# Altium PCB rev.2_2020-05-04_22-29-06.pcbdoc
Units mil, origin at the board's own origin, x right, y up, seen from the top; angles counter-clockwise.
Board outline 1820 x 1875 mil, 2 copper layers (Top Layer, Bottom Layer); 13 components, 21 nets, 74 pads, 46 vias.
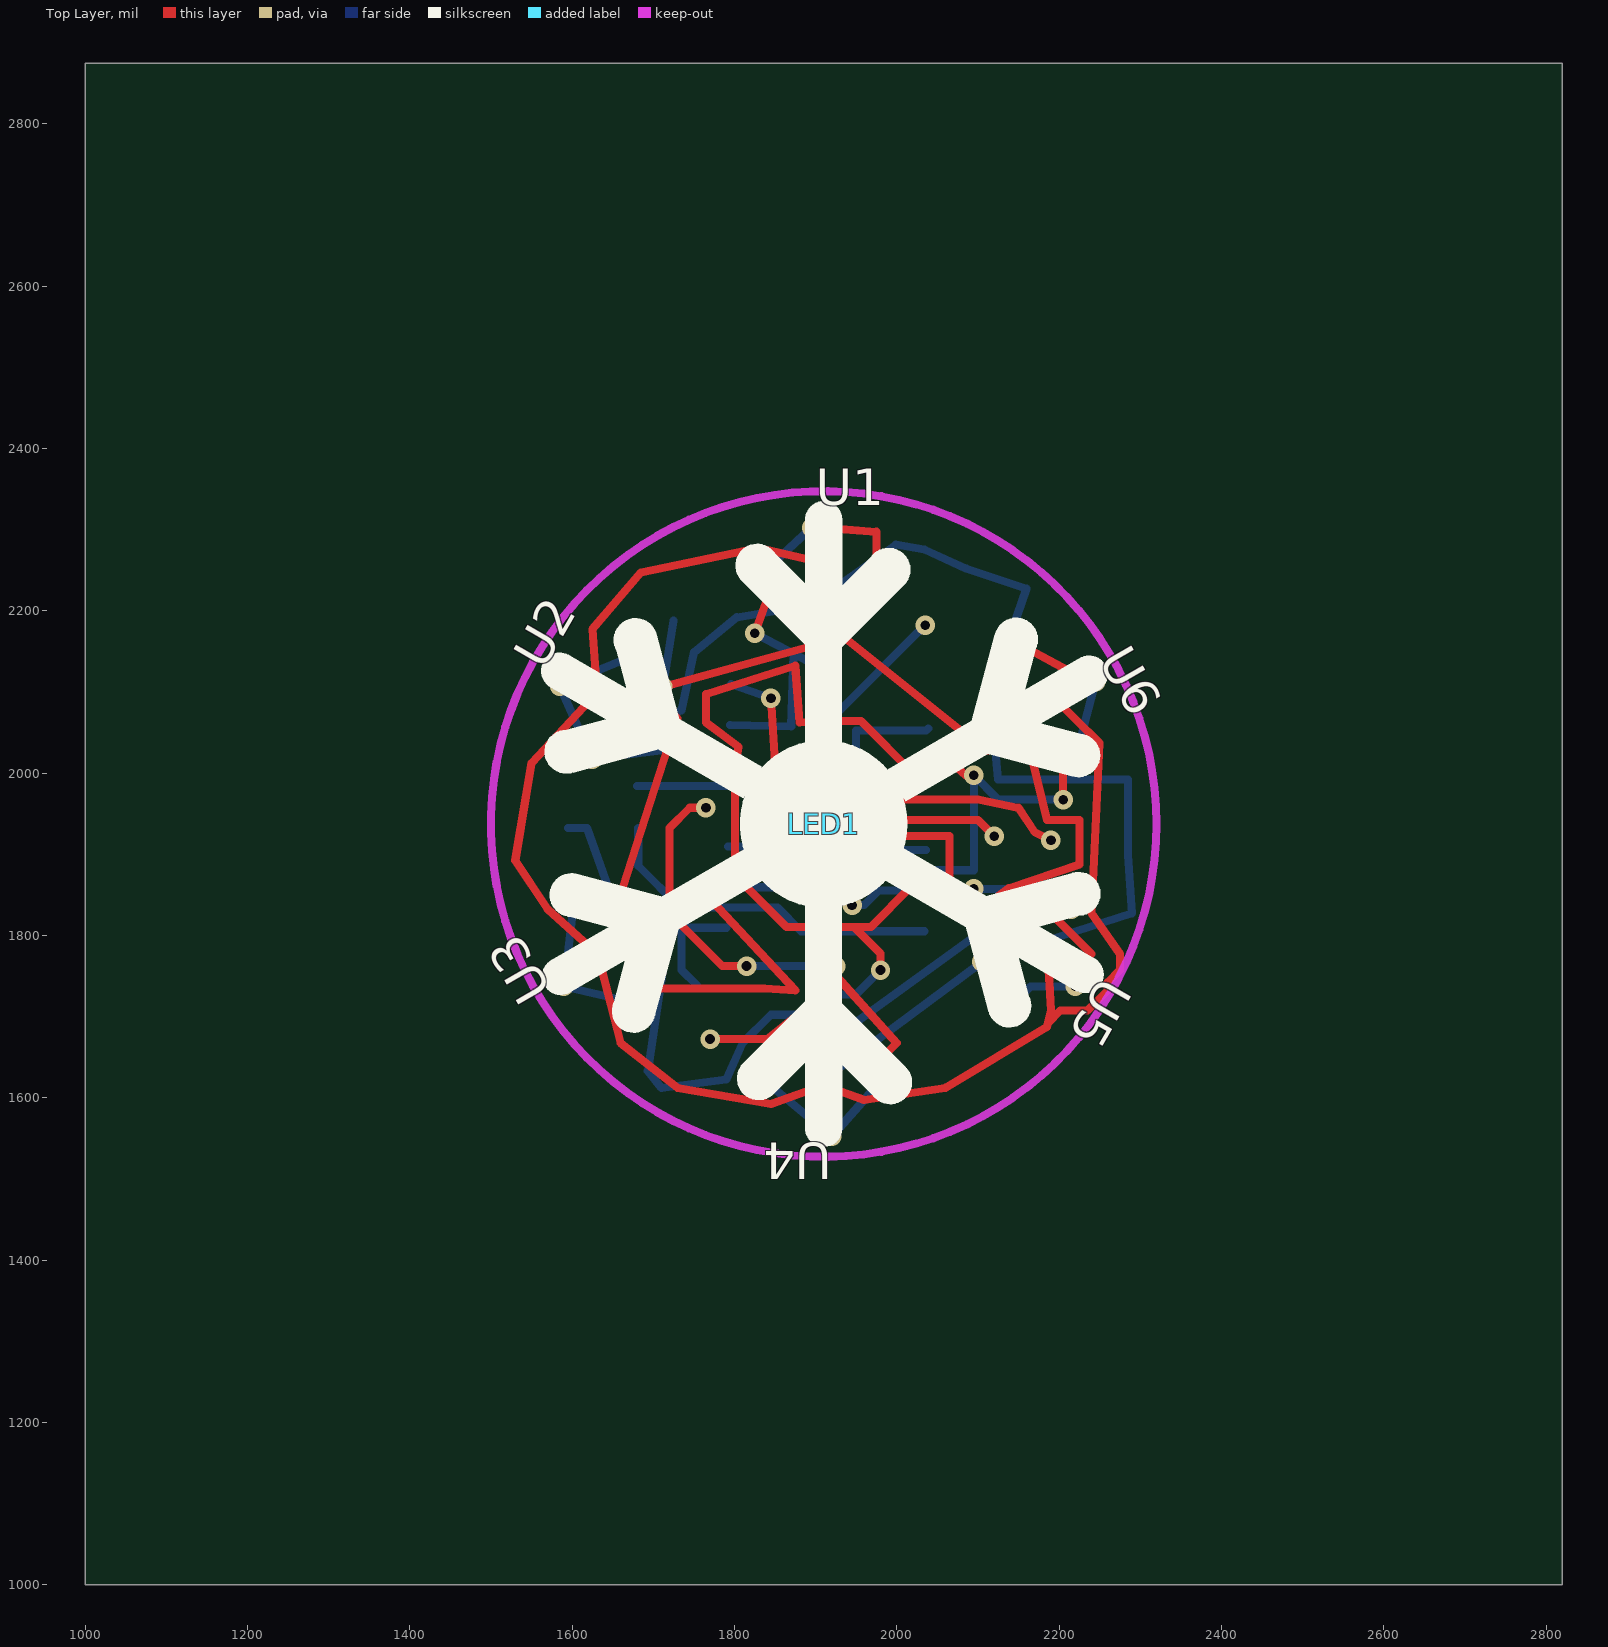
[diagram p0: Top Layer view]
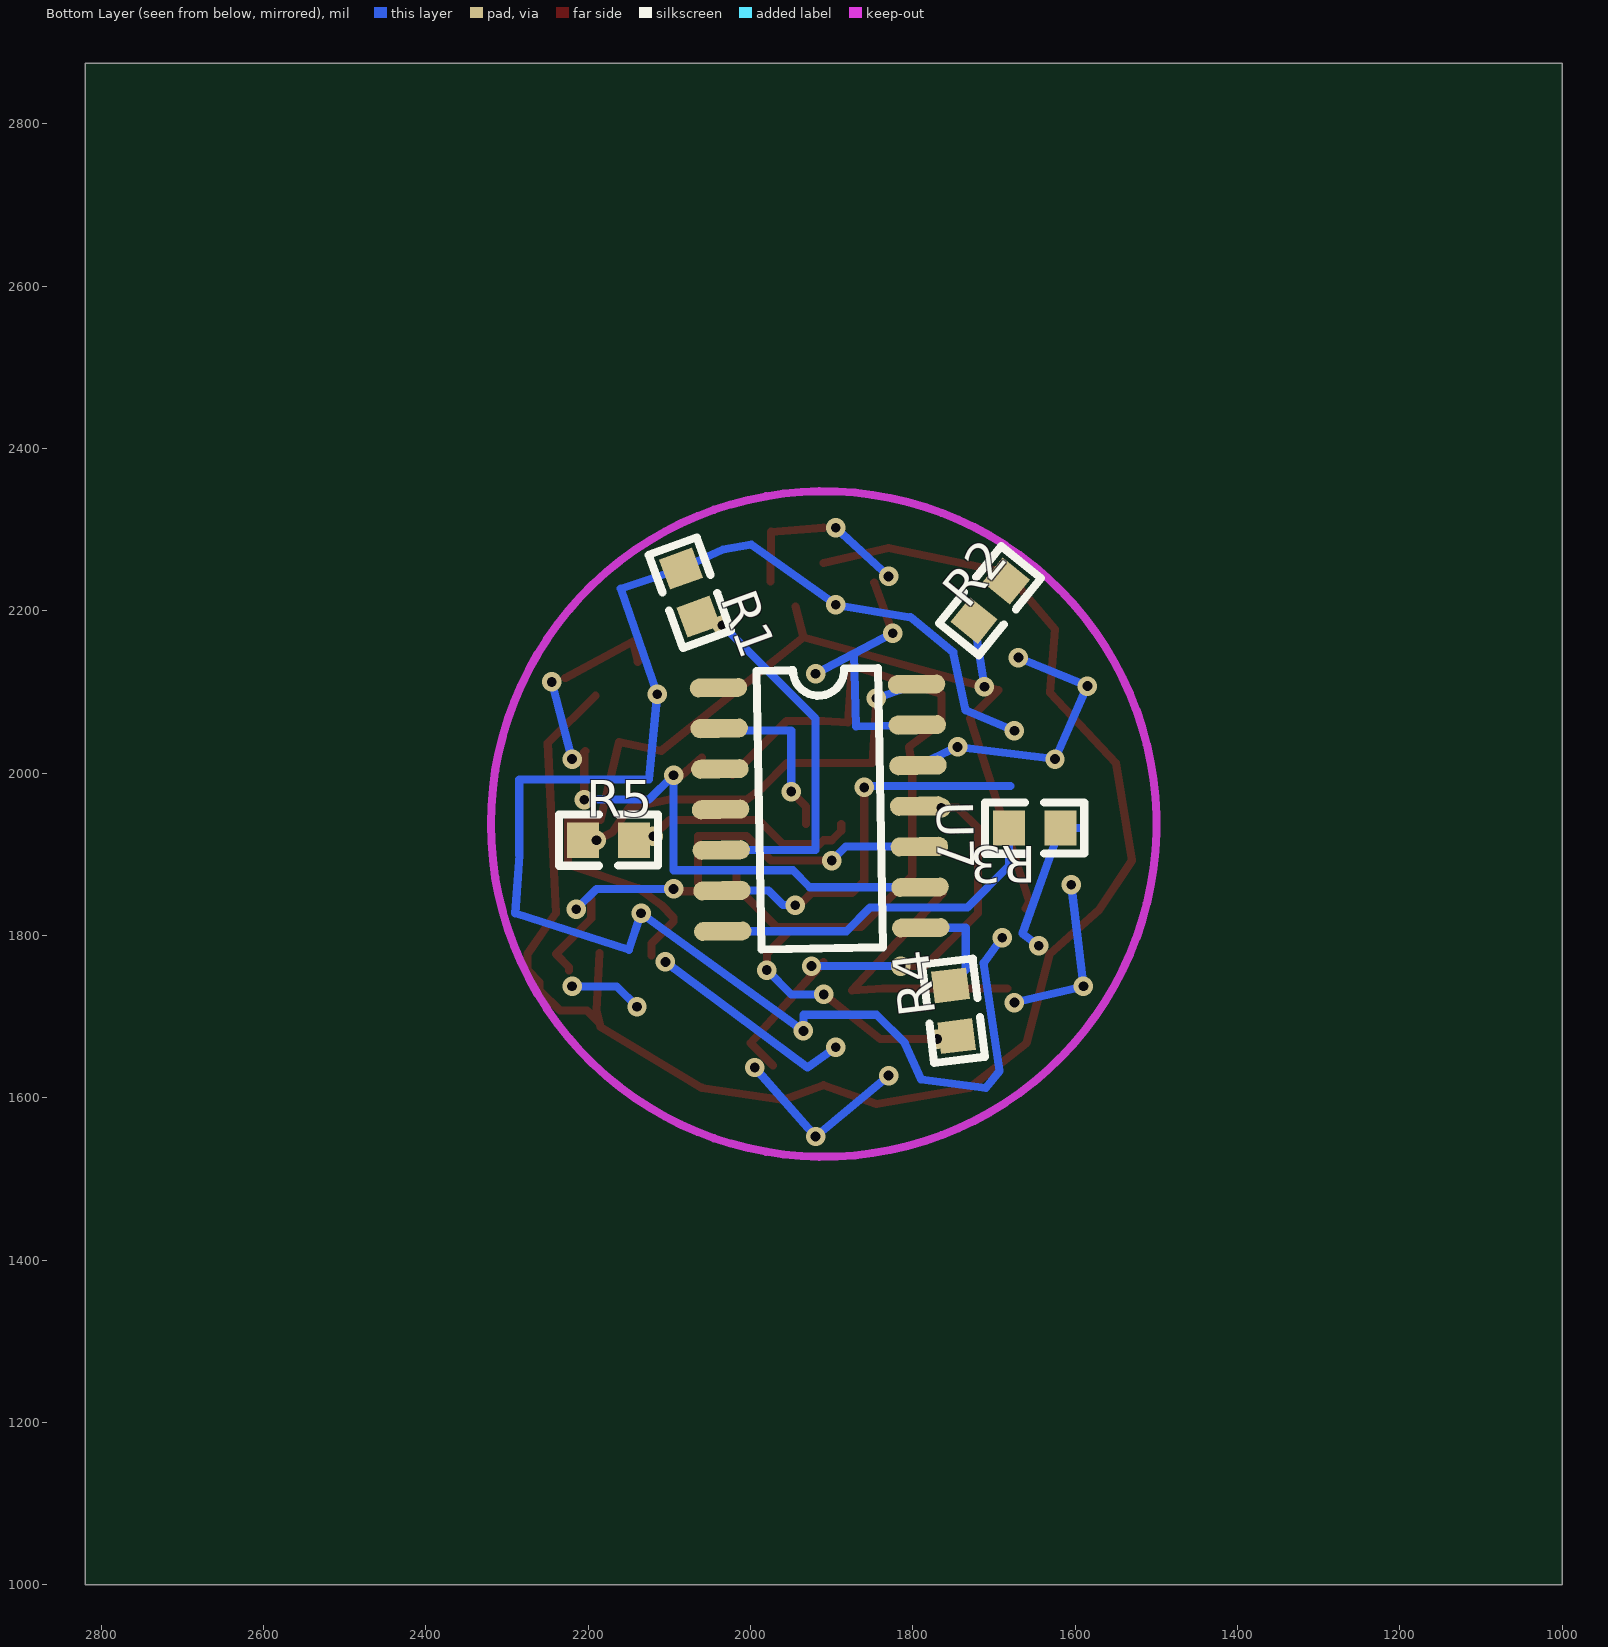
[diagram p1: Bottom Layer view, seen from below]

## Layer stack, top to bottom
Top Layer: signal copper (thickness not stored)
Dielectric: dielectric 12.6, FR-4, Dk 4.8
Bottom Layer: signal copper (thickness not stored)

## Board outline
2820,1000 1000,1000 1000,2875 2820,2875

## Components (designator, comment, footprint, x,y, rotation, side; value= is the part's Value field where it differs from the comment)
LED1 "TJ-S1005SW4TGLC7K-A5" LED0402-RD 1910,1937.5 r0 top
R1 "300" R0603 2075,2222.5 r70 bottom
R2 "300" R0603 1705,2212.5 r309 bottom
R3 "300" R0603 1650,1932.5 r180 bottom
R4 "300" R0603 1750,1707.5 r263 bottom
R5 "180" R0603 2175,1917.5 r0 bottom
U1 "snowflake" SNOWFLAKE_CONNECTOR#1 1950,2142.5 r0 top
U2 "snowflake" SNOWFLAKE_CONNECTOR#2 1752,2075.5 r60 top
U3 "snowflake" SNOWFLAKE_CONNECTOR#2 1713,1869.5 r120 top
U4 "snowflake" SNOWFLAKE_CONNECTOR#3 1870,1732.5 r180 top
U5 "snowflake" SNOWFLAKE_CONNECTOR#3 2065,1802.5 r240 top
U6 "snowflake" SNOWFLAKE_CONNECTOR#1 2110,2002.5 r300 top
U7 "ATTINY84A-SSU" SOIC-14_L8.7-W3.9-P1.27-LS6.0-BL 1915,1957.5 r89 bottom

## Footprints (in the part's own frame and the unit in brackets; to place one, negate y for a bottom-side part, rotate by r counter-clockwise, add the part's x,y. Pads: shape width x height; smd on the part's side, far side on the other; paste and mask are expansions set on the pad)
LED0402-RD [mm]
  rect 0.6x0.5 smd: 1(-0.55,0) 2(0.55,0)
  silkscreen extent -1.15,-0.45 1.05,0.45
R0603 [mm]
  rect 1x1.1 smd: 1(0.8,0) 2(-0.8,0)
  silkscreen extent -1.55,-0.81 1.55,0.8
SNOWFLAKE_CONNECTOR#1 [mil]
  rect 19.69x23.62 smd: 1(-40,-78.3) 4(-40,116.7) 5(-40,-35) 5(-40,160)
  rect 23.62x19.69 smd rot 135: 2(-71.69,62.04)
  rect 23.62x19.69 smd rot 45: 3(-5.31,63.04) 5(25.31,93.66)
  rect 19.69x23.62 smd rot 45: 5(-102.31,92.66)
  silkscreen extent -144,-104 62,190
SNOWFLAKE_CONNECTOR#2 [mil]
  rect 19.69x23.62 smd: 1(-40,-78.3) 4(-40,116.7) 5(-40,160) 5(-40,-35)
  rect 19.69x23.62 smd rot 45: 2(-71.69,62.04) 5(-102.31,92.66)
  rect 23.62x19.69 smd rot 45: 3(-5.31,63.04) 5(25.31,93.66)
  silkscreen extent -144,-104 62,190
SNOWFLAKE_CONNECTOR#3 [mil]
  rect 19.69x23.62 smd: 1(-40,-78.3) 4(-40,116.7) 5(-40,160) 5(-40,-35)
  rect 19.69x23.62 smd rot 45: 2(-71.69,62.04)
  rect 23.62x19.69 smd rot 45: 3(-5.31,63.04) 5(25.31,93.66)
  rect 23.62x19.69 smd rot 135: 5(-102.31,92.66)
  silkscreen extent -144,-104 62,190
SOIC-14_L8.7-W3.9-P1.27-LS6.0-BL [mm]
  oval 0.6x1.798 smd: 1(3.81,3.1) 2(2.54,3.1) 3(1.27,3.1) 4(0,3.1) 5(-1.27,3.1) 6(-2.54,3.1) 7(-3.81,3.1) 8(-3.81,-3.1) 9(-2.54,-3.1) 10(-1.27,-3.1) 11(0,-3.1) 12(1.27,-3.1) 13(2.54,-3.1) 14(3.81,-3.1)
  silkscreen extent -4.4,-1.91 4.34,1.9

## Via types
v1: diameter 24, hole 12, Top Layer to Bottom Layer, 46 vias

## Nets (pads, with @x,y where several pads share a name; then routed paths per layer and width w, separated by ;. In a path a pad name is that pad's centre, name@x,y a point inside that pad or via, vN(x,y) a via of type N, cw(c..) or ccw(c..) an arc to the next point about the centre after c; other vN are vias at no path point)
GND: R5.1 U7.14 | length 509.3
  Top Layer w10: v1(1845,2092.5) 1850,2012.5 1955,2012.5 1985,1982.5 2005,1967.5 2100,1967.5 2150,1957.5 2170,1927.5 v1(2190,1917.5)
  Bottom Layer w10: U7.14 v1(1845,2092.5)
LED1_1: LED1.1 R5.2 | length 267.6
  Top Layer w10: LED1.1@1888.35,1937.5 1888.35,1929.15 1900,1917.5 1910,1917.5 1915,1912.5 1960,1912.5 1990,1942.5 2100,1942.5 v1(2120,1922.5)
LED1_2: LED1.2 U7.2 | length 212.6
  Top Layer w10: LED1.2@1931.65,1937.5 1931.65,1959.15 v1(1950,1977.5)
  Bottom Layer w10: v1(1950,1977.5) 1950,2052.5 2035.93,2052.5 U7.2@2038.78,2055.35
R1_2: R1.2 U7.5 | length 440.9
  Bottom Layer w10: v1(2035,2182.5) 1920,2067.5 1920,1905.4 U7.5
R2_2: R2.2 U7.6 | length 490.1
  Top Layer w10: v1(1860,1982.5) 1860,1867.5 1875,1852.5 1925,1852.5 1940,1837.5 v1(1945,1837.5)
  Bottom Layer w10: 1680,1984.5 v1@1860,1984.5 ; v1(1945,1837.5) 1960,1837.5 1977.88,1855.38 U7.6
R3_2: R3.2 U7.7 | length 432.8
  Bottom Layer w10: R3.2 1681.5,1886 1733,1834.5 1853,1834.5 1882.1,1805.4 U7.7
R4_2: R4.2 U7.8 | length 134
  Bottom Layer w10: R4.2 1735,1757.6 1735,1809.7 U7.8@1790.3,1809.7
S$7: 
U1_1: R4.1 U1.1 U2.1 U3.1 U4.1 U5.1 U6.1 | length 1187.3
  Top Layer w10: v1(1770,1672.5) 1840,1672.5 v1(1910,1727.5) ; 1947.32,1810.8 1980,1778.12 v1(1980,1757.5) ; U5.1 2017.19,1859.69 1968.3,1810.8 U4.1 1864.02,1810.8 U3.1 1800.81,2000.71 U2.1 1805,2032.5 1765,2062.5 1765,2097.5 1875,2132.5 1880,2062.5 U1.1 1955.98,2064.2 U6.1
  Bottom Layer w10: v1(1910,1727.5) 1950,1727.5 v1(1980,1757.5)
U1_2: R1.1 U1.2 U2.2 U3.2 U4.2 U5.2 U6.2 | length 2096.9
  Bottom Layer w10: v1(1675,2052.5) 1735,2077.5 1750.4,2149.2 1802.9,2192.2 v1(1895,2207.5) 1998.8,2281.6 2034,2275.7 R1.1 ; v1(1690,1797.5) 1713,1766.5 1693.3,1633.4 1710,1612.5 1790,1622.5 1810,1667.5 1845,1702.5 1935,1702.5 v1(1935,1682.5) v1(2135,1827.5) 2150,1782.5 2290,1827.5 2285,1899.2 2285,1992.5 2125,1992.5 v1(2115,2097.5) 2160,2227.5 R1.1
U1_3: R2.1 U1.3 U2.3 U3.3 U4.3 U5.3 U6.3 | length 1604.8
  Top Layer w10: U3.3 1656.8,1841.7 1729.7,2067.7 U2.3 v1(1712,2106.5) 1935,2167.5 ; U1.3 1935,2167.5 ; U5.3 2122.25,1790.25 2095,1817.5 2095,1822.5 2110,1837.5 2138,1858.5 2225,1887.5 2225,1942.5 2185,1942.5 U6.3 2110,2027.5 1935,2167.5
  Bottom Layer w10: v1(1712,2106.5) R2.1 ; v1(1895,1662.5) 1930,1637.5 v1(2105,1767.5)
U1_4: R3.1 U1.4 U2.4 U3.4 U4.4 U5.4 U6.4 | length 2258.5
  Top Layer w10: U1.4 1830,2277.5 1685,2247.5 1625,2177.5 U2.4 1550,2012.5 1530,1892.5 1570,1832.5 U3.4 1660,1667.5 1730,1612.5 1845,1592.5 U4.4 1960,1597.5 2060,1612.5 2185,1687.5 2190,1707.5 U5.4 ; 2186.18,1692.21 2201.47,1707.5 2235,1707.5 2260,1732.5 2260,1742.5 2275,1757.5 2275,1777.5 2240,1827.5 2250,2037.5 U6.4
  Bottom Layer w10: 1595,1932.5 R3.1 1665,1802.5 v1(1645,1787.5)
U1_5: U1.5 U7.13 | length 554.2
  Top Layer w10: v1(1825,2172.5) U1.5@1847.69,2235.16 ; U1.5@1910,2302.5 1975,2297.5 U1.5@1975.31,2236.16
  Bottom Layer w10: U7.13 1870,2057.5 1872.83,2147.33 ; v1(1825,2172.5) v1(1920,2122.5) ; v1(1830,2242.5) v1(1895,2302.5)
U2_5: U2.5 U7.12 | length 365.3
  Bottom Layer w10: v1(1670,2142.5) v1(1585,2107.5) v1(1625,2017.5) v1(1745,2032.5) U7.12
U3_5: U3.5 | length 568.2
  Top Layer w10: U3.5@1683.9,1734.6 1837.1,1734.6 1875,1732.5 U3.5@1763.3,1852.4
  Bottom Layer w10: v1(1605,1862.5) v1(1590,1737.5) v1(1675,1717.5)
U4_5: U4.5 U7.11 | length 796.5
  Top Layer w10: v1(1765,1957.5) 1745,1957.5 1720,1932.5 1720,1827.5 1785,1762.5 v1(1815,1762.5) ; U4.5@1910,1767.5 2000,1667.5 U4.5@1972.31,1639.84
  Bottom Layer w10: v1(1815,1762.5) v1(1925,1762.5) ; v1(1830,1627.5) v1(1920,1552.5) v1(1995,1637.5)
U5_5: U5.5 U7.10 | length 739.3
  Top Layer w10: v1(1900,1892.5) 1975,1892.5 2005,1922.5 2065,1922.5 2065,1865 U5.5@2054.7,1854.6 ; U5.5@2054.69,1854.64 2092.14,1854.64 v1(2095,1857.5) ; U5.5@2196.4,1844.77 2196.4,1821.1 2240,1777.5 2223.56,1761.06 U5.5@2223.56,1757.14
  Bottom Layer w10: U7.10 1882.86,1909.64 v1(1900,1892.5) ; v1(2095,1857.5) 2190,1857.5 v1(2215,1832.5) ; v1(2140,1712.5) 2165,1737.5 v1(2220,1737.5)
U6_5: U6.5 U7.9 | length 875
  Top Layer w10: U6.5@2059.7,2019.6 2085,1997.5 v1(2095,1997.5) ; U6.5@2139.09,2137.43 2145,2162.5 U6.5@2228.56,2117.14 ; U6.5@2203.77,2027.41 2205,2026.18 v1(2205,1967.5)
  Bottom Layer w10: U7.9 1927.1,1859.6 1948,1880.5 2095,1880.5 v1(2095,1997.5) 2125,1967.5 v1(2205,1967.5) ; v1(2220,2017.5) v1(2245,2112.5)
U7_3: U7.3
U7_4: U7.4
VCC: U7.1

## Keep-outs
Keep-Out Layer:
  circle w10 net S$7: c1910,1937.5 r410

## Silkscreen, mask and mechanical layers (free items; w line width, h text height)
Top Overlay:
  circle w10: c1910,1937.5 r98.43
  region: 1835,2002.5 1845,2012.5 1870,2027.5 1915,2037.5 1925,2032.5 1950,2027.5 1970,2012.5 1975,2007.5 1995,1982.5 2005,1972.5 2005,1947.5 2005,1932.5 2010,1927.5 2005,1907.5 1995,1892.5 1980,1867.5 1960,1857.5 1945,1842.5 1900,1842.5 1895,1837.5 1885,1842.5 1875,1847.5 1865,1847.5 1835,1877.5 1820,1892.5 1820,1912.5 1815,1917.5 1815,1952.5 1810,1957.5 1815,1962.5 1825,1982.5 1825,1992.5 1835,2002.5 1840,2007.5
Document:
  lines w0.1: 1909,1936.5 1911,1938.5